# Altium PCB PCB2.PcbDoc
Units mil, origin at the board's own origin, x right, y up, seen from the top; angles counter-clockwise.
Board outline 3000 x 4000 mil, 2 copper layers (Top Layer, Bottom Layer); 26 components, 48 nets, 184 pads, 77 vias.
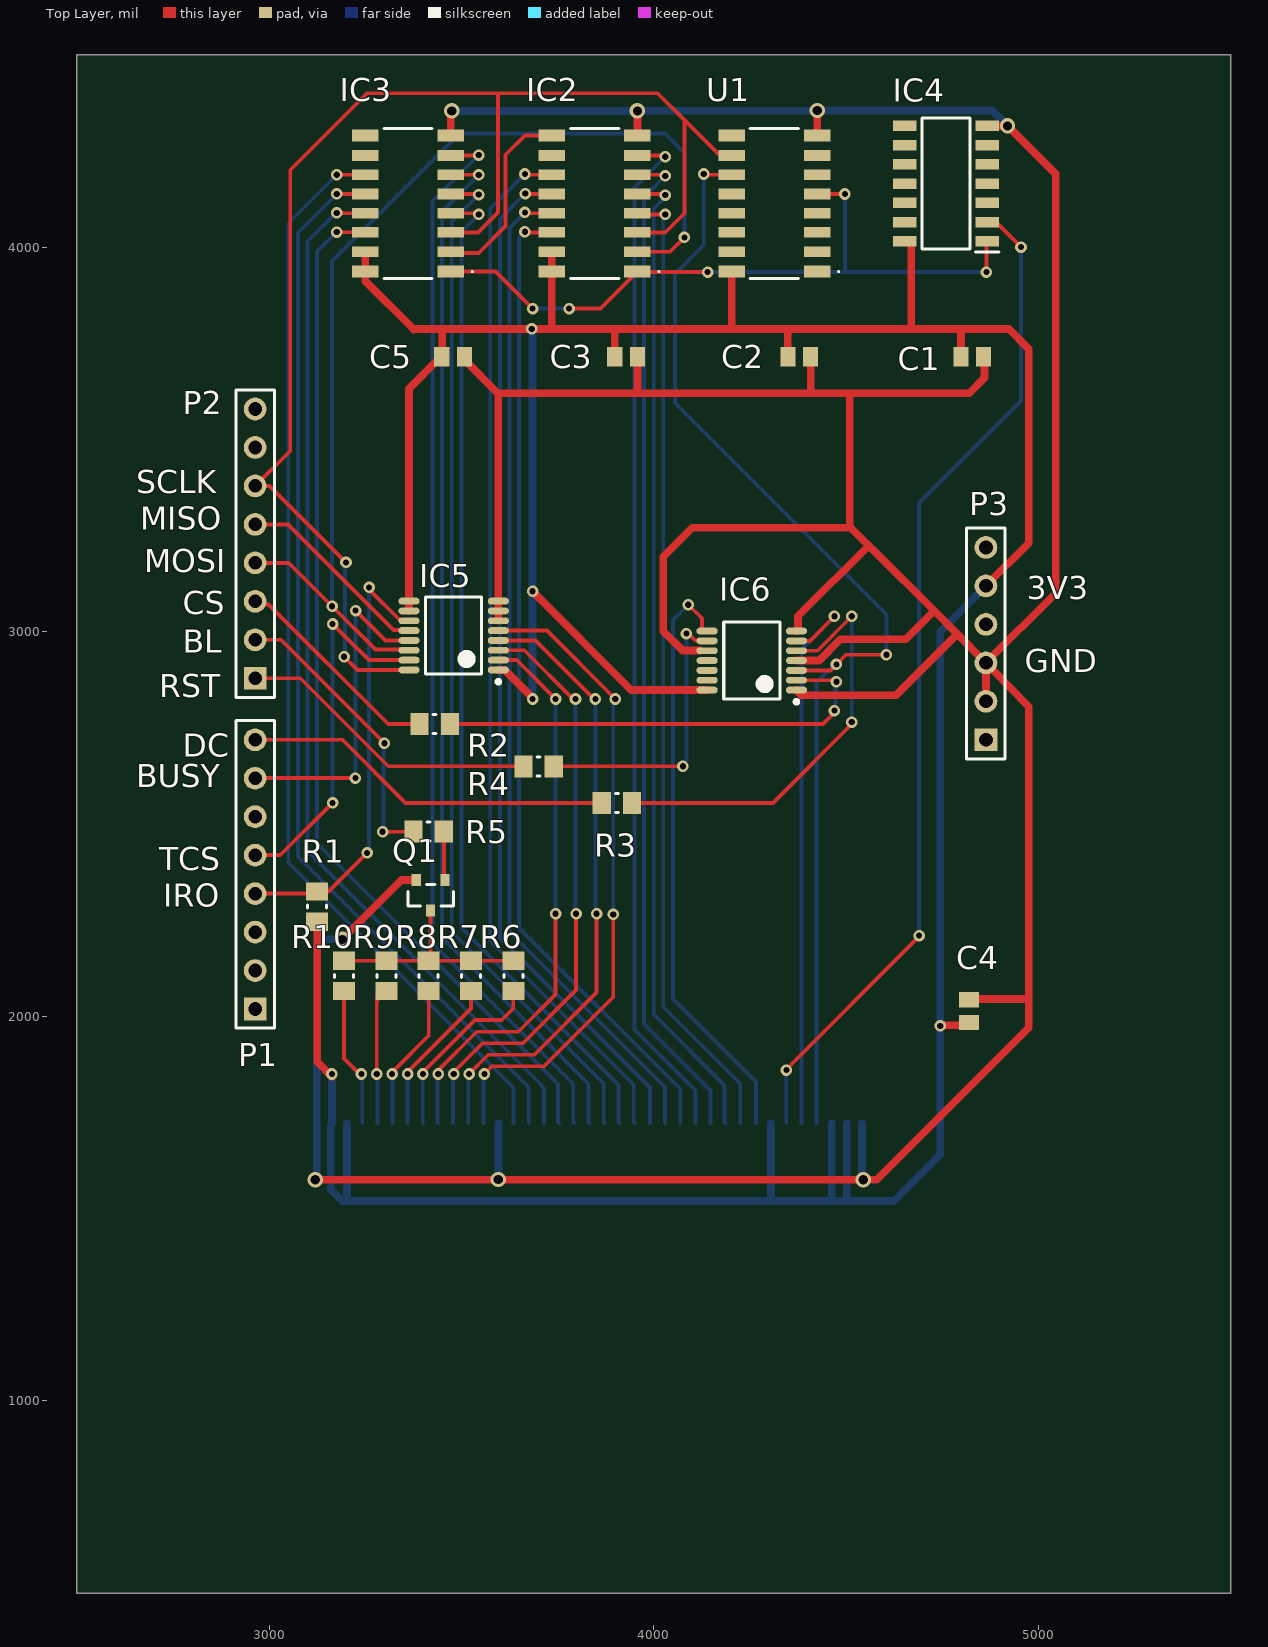
[diagram p0: Top Layer view]
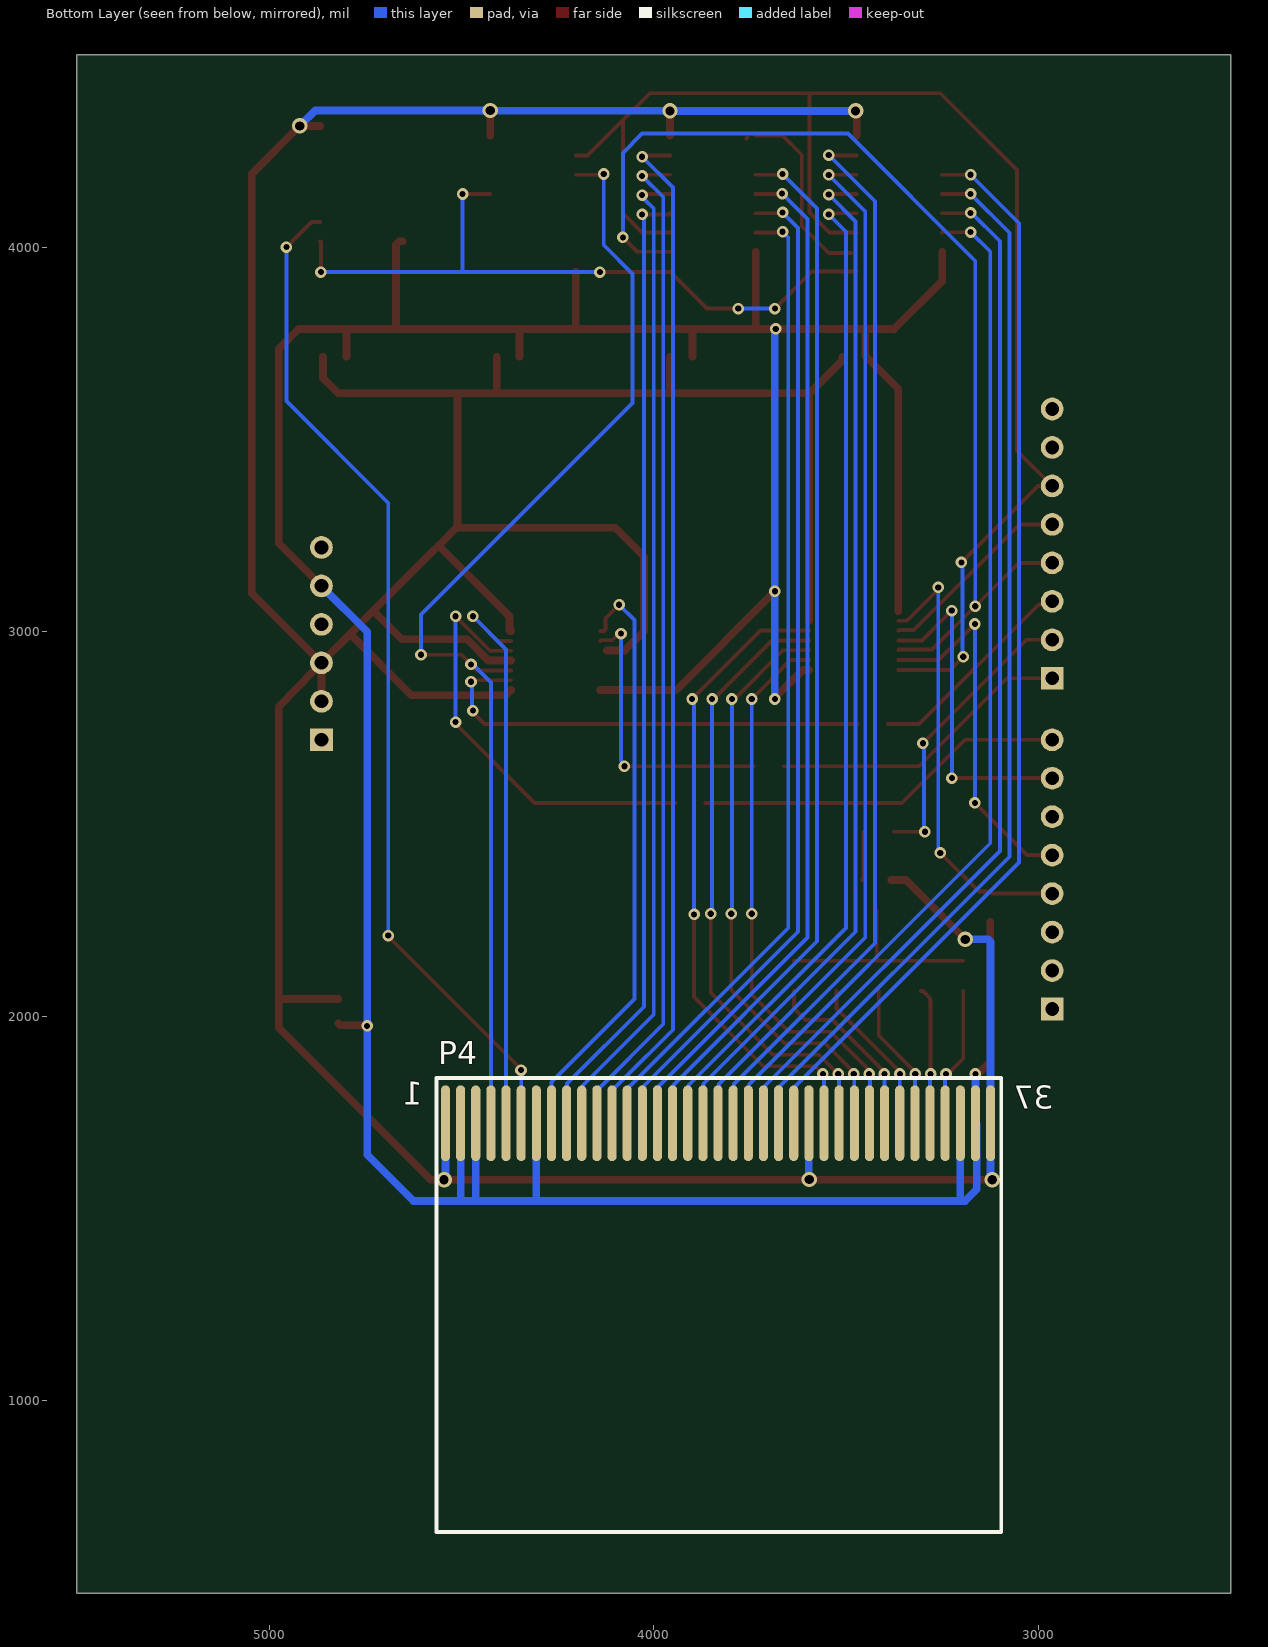
[diagram p1: Bottom Layer view, seen from below]
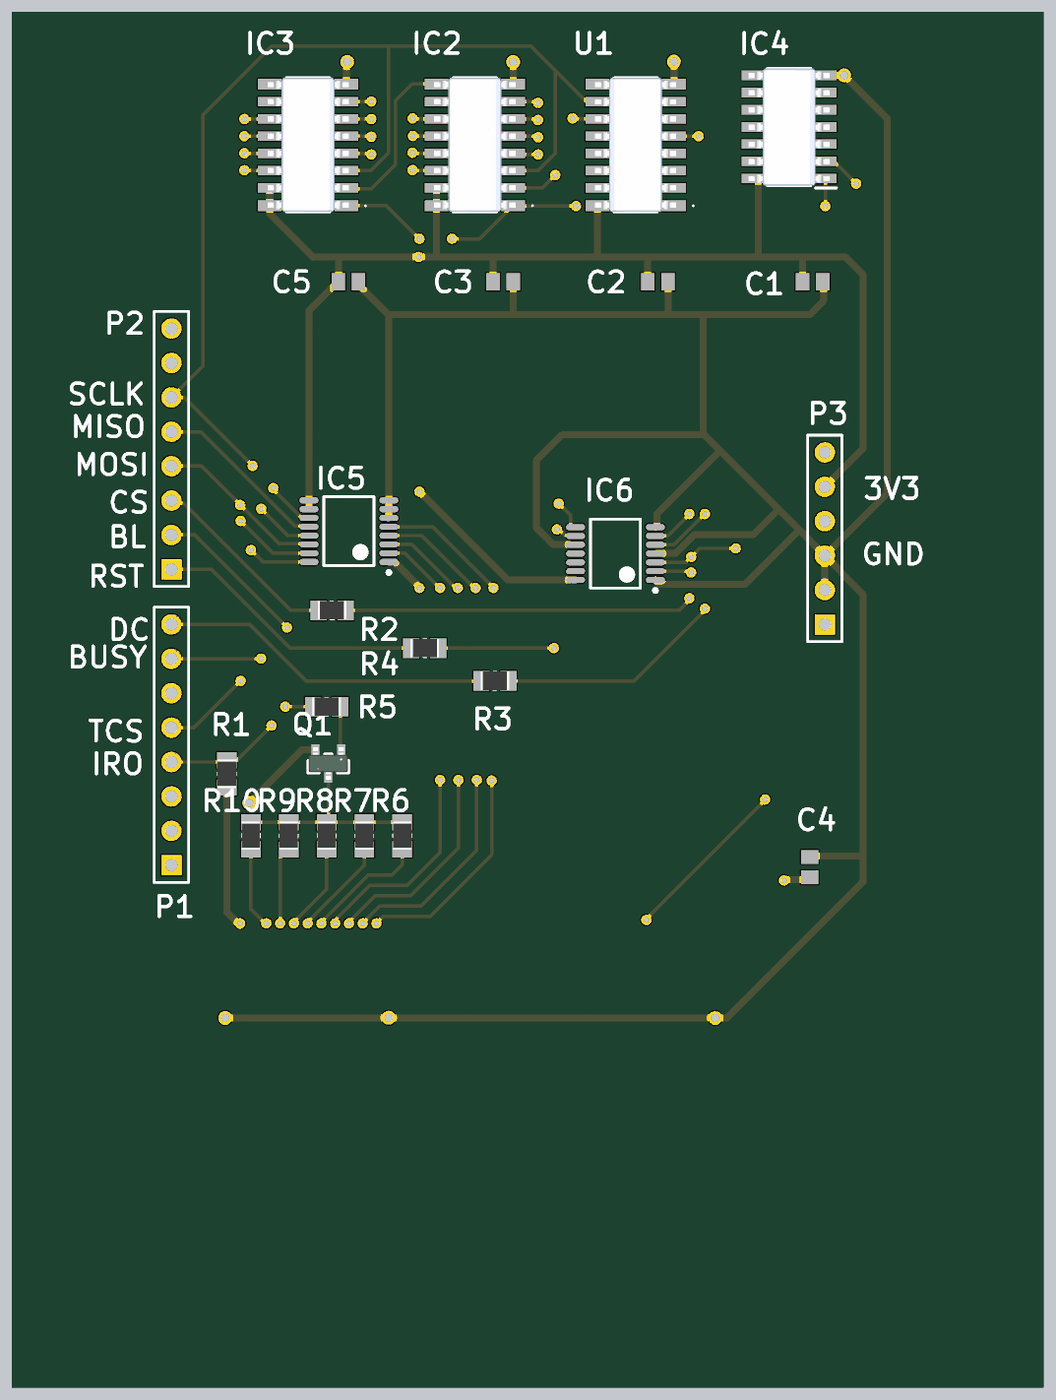
[diagram p2: 3D render of the assembled board from above, using the file's embedded part models]

## Layer stack, top to bottom
Top Solder: solder mask 0.4, Solder Resist, Dk 3.5
Top Layer: signal copper 1.4
Dielectric 1: dielectric 12.6, FR-4, Dk 4.8
Bottom Layer: signal copper 1.4
Bottom Solder: solder mask 0.4, Solder Resist, Dk 3.5

## Board outline
2500,500 5500,500 5500,4500 2500,4500

## Design rules (kind name [scope] priority, off if disabled: settings)
AcuteAngle [All] p1: minimum=9.00000000000000E+0001 checktracksonly=FALSE
Clearance [All] p1: gap=6 ignorepadtopadclearanceinfootprint=FALSE
HoleSize [All] p1: absolutevalues=TRUE maxlimit=200 minlimit=1 maxpercent=80.000 minpercent=20.000
PolygonConnect [All] p1: connectstyle=Relief reliefconductorwidth=10 reliefentries=4 polygonreliefangle="90 Angle" airgapwidth=10
RoutingVias [All] p1: holewidth=18 width=30 viastyle="Through Hole" minholewidth=12 minwidth=20 maxholewidth=28 maxwidth=50
ShortCircuit [All] p1 off: allowed=FALSE
SolderMaskExpansion [All] p1: expansion=4 istentingtop=FALSE
UnRoutedNet [All] p1 off:
Width [All] p1: maxlimit=100 minlimit=6 preferedwidth=10
27 further rules are at their usual default settings.

## Components (designator, comment, footprint, x,y, rotation, side; value= is the part's Value field where it differs from the comment)
C1 "104" CAPC2013X135X45LL10T25 4828.43,3715 r180 top
C2 "104" CAPC2013X135X45LL10T25 4378.43,3715 r180 top
C3 "104" CAPC2013X135X45LL10T25 3928.43,3715 r0 top
C4 "104" CAPC2013X135X45LL10T25 4820,2013.43 r90 top
C5 "104" CAPC2013X135X45LL10T25 3478.43,3715 r0 top
IC2 "74HC4094" 74HC4094D653 3846.22,4113.03 r90 top
IC3 "74HC4094" 74HC4094D653 3361.22,4113.03 r90 top
IC4 "74HC04D,653" SOIC127P600X175-14N 4760,4165 r180 top
IC5 "XPT2046" TSOP65P640X110-16N 3480,2990 r180 top
IC6 "74VHC125" SOP65P640X510-14N 4255,2925 r180 top
P1 "Header 8" HDR1X8 2963.86,2018.99 r90 top
P2 "Header 8" HDR1X8 2963.86,2878.99 r90 top
P3 "Header 6" HDR1X6 4863.85,2718.99 r90 top
P4 "Connector37" C37 4565,1840 r180 bottom
Q1 "SS8050-G" FP-SS8050-G-MFG 3420,2314.76 r270 top
R1 "100K" RESC2013X60X35ML10T20 3125,2285 r90 top
R2 "3K3" RESC2013X60X35ML10T20 3430.67,2760 r0 top
R3 "3K3" RESC2013X60X35ML10T20 3904.37,2555 r0 top
R4 "3K3" RESC2013X60X35ML10T20 3700.63,2650 r180 top
R5 "1K" RESC2013X60X35ML10T20 3415,2480 r0 top
R6 "10R" RESC2013X60X35ML10T20 3635,2105 r270 top
R7 "10R" RESC2013X60X35ML10T20 3525,2105 r270 top
R8 "10R" RESC2013X60X35ML10T20 3415,2105 r270 top
R9 "10R" RESC2013X60X35ML10T20 3305,2105 r270 top
R10 "10R" RESC2013X60X35ML10T20 3195,2105 r270 top
U1 "74HC4040" 74HC4040D653 4313.78,4113.03 r90 top

## Footprints (in the part's own frame and the unit in brackets; to place one, negate y for a bottom-side part, rotate by r counter-clockwise, add the part's x,y. Pads: shape width x height; smd on the part's side, far side on the other; paste and mask are expansions set on the pad)
74HC4040D653 [mm]
  rect 0.8x1.75 smd: 1(-4.495,-2.825) 8(4.495,-2.825) 9(4.495,2.825) 16(-4.495,2.825)
  rect 0.7x1.75 smd: 2(-3.175,-2.825) 3(-1.905,-2.825) 4(-0.635,-2.825) 5(0.635,-2.825) 6(1.905,-2.825) 7(3.175,-2.825) 10(3.175,2.825) 11(1.905,2.825) 12(0.635,2.825) 13(-0.635,2.825) 14(-1.905,2.825) 15(-3.175,2.825)
  silkscreen extent -4.95,-4.3 4.95,1.6, body extent -4.95,-3 4.95,3, height 1.56
74HC4094D653 [mm]
  rect 0.8x1.75 smd: 1(-4.495,-2.825) 8(4.495,-2.825) 9(4.495,2.825) 16(-4.495,2.825)
  rect 0.7x1.75 smd: 2(-3.175,-2.825) 3(-1.905,-2.825) 4(-0.635,-2.825) 5(0.635,-2.825) 6(1.905,-2.825) 7(3.175,-2.825) 10(3.175,2.825) 11(1.905,2.825) 12(0.635,2.825) 13(-0.635,2.825) 14(-1.905,2.825) 15(-3.175,2.825)
  silkscreen extent -4.95,-4.3 4.95,1.6, body extent -4.95,-3 4.95,3, height 1.56
C37 [mm]
  oval 0.6x5 smd: 1(0.6,-3) 2(1.6,-3) 3(2.6,-3) 4(3.6,-3) 5(4.6,-3) 6(5.6,-3) 7(6.6,-3) 8(7.6,-3) 9(8.6,-3) 10(9.6,-3) 11(10.6,-3) 12(11.6,-3) 13(12.6,-3) 14(13.6,-3) 15(14.6,-3) 16(15.6,-3) 17(16.6,-3) 18(17.6,-3) 19(18.6,-3) 20(19.6,-3) 21(20.6,-3) 22(21.6,-3) 23(22.6,-3) 24(23.6,-3) 25(24.6,-3) 26(25.6,-3) 27(26.6,-3) 28(27.6,-3) 29(28.6,-3) 30(29.6,-3) 31(30.6,-3) 32(31.6,-3) 33(32.6,-3) 34(33.6,-3) 35(34.6,-3) 36(35.6,-3) 37(36.6,-3)
  silkscreen extent 0,-30 37.3,0
CAPC2013X135X45LL10T25 [mm] "Chip Capacitor, 2-Leads, Body 2.00x1.25mm, IPC High Density"
  rect 1x1.3 smd: 1(-0.75,0) 2(0.75,0)
  body extent -1.05,-0.67 1.05,0.68, height 1.35
FP-SS8050-G-MFG [mm]
  rect 0.8x0.6 smd paste+0 mask+0: 1(-1.01,0.95) 2(-1.01,-0.95) 3(1.01,0)
  silkscreen extent -0.7,-1.5 0.7,1.5, body extent -1.51,-1.6 1.51,1.6, height 0.25
HDR1X6 [mm] "Connector; Header; 6 Position"
  rect 1.5x1.5 hole 0.9: 1(0,0)
  round 1.5 hole 0.9: 2(2.54,0) 3(5.08,0) 4(7.62,0) 5(10.16,0) 6(12.7,0)
  silkscreen extent -1.27,-1.27 13.97,1.27
HDR1X8 [mm] "Connector; Header; 8 Position"
  rect 1.5x1.5 hole 0.9: 1(0,0)
  round 1.5 hole 0.9: 2(2.54,0) 3(5.08,0) 4(7.62,0) 5(10.16,0) 6(12.7,0) 7(15.24,0) 8(17.78,0)
  silkscreen extent -1.27,-1.27 19.05,1.27
RESC2013X60X35ML10T20 [mm] "Chip Resistor, 2-Leads, Body 2.1x1.35mm, IPC Low Density"
  rect 1.2x1.45 smd: 1(-1,0) 2(1,0)
  silkscreen extent -0.1,-0.63 0.1,0.63, body extent -1.05,-0.68 1.05,0.67, height 0.6
SOIC127P600X175-14N [mm]
  rect 1.55x0.7 smd: 1(-2.725,3.81) 2(-2.725,2.54) 3(-2.725,1.27) 4(-2.725,0) 5(-2.725,-1.27) 6(-2.725,-2.54) 7(-2.725,-3.81) 8(2.725,-3.81) 9(2.725,-2.54) 10(2.725,-1.27) 11(2.725,0) 12(2.725,1.27) 13(2.725,2.54) 14(2.725,3.81)
  silkscreen extent -3.5,-4.33 1.6,4.51, body extent -3,-4.31 3,4.34, height 1.56
SOP65P640X510-14N [mm] "SOP, 14-Leads, Body 5.00x4.40mm, Pitch 0.65mm, IPC Medium Density"
  oval 1.4x0.45 smd: 1(-2.95,1.95) 2(-2.95,1.3) 3(-2.95,0.65) 4(-2.95,0) 5(-2.95,-0.65) 6(-2.95,-1.3) 7(-2.95,-1.95) 8(2.95,-1.95) 9(2.95,-1.3) 10(2.95,-0.65) 11(2.95,0) 12(2.95,0.65) 13(2.95,1.3) 14(2.95,1.95)
  silkscreen extent -3.08,-2.55 1.85,2.85, body extent -2.25,-2.55 2.25,2.55, height 5.1
TSOP65P640X110-16N [mm] "TSOP, 16-Leads, Body 5.00x4.40mm, Pitch 0.65mm, IPC Medium Density"
  oval 1.4x0.45 smd: 1(-2.95,2.275) 2(-2.95,1.625) 3(-2.95,0.975) 4(-2.95,0.325) 5(-2.95,-0.325) 6(-2.95,-0.975) 7(-2.95,-1.625) 8(-2.95,-2.275) 9(2.95,-2.275) 10(2.95,-1.625) 11(2.95,-0.975) 12(2.95,-0.325) 13(2.95,0.325) 14(2.95,0.975) 15(2.95,1.625) 16(2.95,2.275)
  silkscreen extent -3.08,-2.55 1.85,3.17, body extent -2.25,-2.55 2.25,2.55, height 1.1

## Part data
C1 C2 C3 C4 C5: library part CMP-2007-03607-1, Manufacturer=Murata, Part Number=GRM21BR72E103KW03L
IC2 IC3: library part 74HC4094D,653, "Integrated Circuit", Manufacturer_Name=Nexperia, Mouser Part Number=771-74HC4094D-T, Arrow Part Number=74HC4094D,653, Arrow Price/Stock=https://www.arrow.com/en/products/74hc4094d653/nexperia?region=nac, Datasheet Link=https://assets.nexperia.com/documents/data-sheet/74HC_HCT4094.pdf, Height=1.75mm, Manufacturer_Part_Number=74HC4094D,653, Mouser Price/Stock=https://www.mouser.co.uk/ProductDetail/Nexperia/74HC4094D653?qs=P62ublwmbi%2FnjmcB1cThvQ%3D%3D
IC4: "Integrated Circuit", Manufacturer_Name=Nexperia, Mouser Part Number=771-74HC04D-T, Arrow Part Number=74HC04D,653, Arrow Price/Stock=https://www.arrow.com/en/products/74hc04d653/nexperia?region=nac, Datasheet Link=https://assets.nexperia.com/documents/data-sheet/74HC_HCT04.pdf, Height=1.75mm, Manufacturer_Part_Number=74HC04D,653, Mouser Price/Stock=https://www.mouser.co.uk/ProductDetail/Nexperia/74HC04D653?qs=P62ublwmbi%252BLi7Vd8cc7xw%3D%3D
IC6: library part 74VHC125D,118, "Integrated Circuit", Manufacturer_Name=Nexperia, Mouser Part Number=771-74VHC125D118, Arrow Part Number=74VHC125D,118, Arrow Price/Stock=https://www.arrow.com/en/products/74vhc125d118/nexperia?region=nac, Datasheet Link=https://assets.nexperia.com/documents/data-sheet/74VHC_VHCT125.pdf, Height=1.75mm, Manufacturer_Part_Number=74VHC125D,118, Mouser Price/Stock=https://www.mouser.co.uk/ProductDetail/Nexperia/74VHC125D118?qs=jquClx72t9AbaQROblJdHA%3D%3D
P1 P2: "Header, 8-Pin", LatestRevisionDate=17-Jul-2002, LatestRevisionNote="Re-released for DXP Platform.", Publisher="Altium Limited"
P3: "Header, 6-Pin", LatestRevisionDate=17-Jul-2002, LatestRevisionNote="Re-released for DXP Platform.", Publisher="Altium Limited"
Q1: library part CMP-20235-000001-1, "NPN TRANSISTOR 1.5A 40V SOT-23 R", Case/Package=TO-236-3, Collector Emitter Breakdown Voltage=25V, Collector Emitter Voltage (VCEO)=400mV, Max Collector Current=1.5A, Max Power Dissipation=300mW, Transition Frequency=100MHz, Max Breakdown Voltage=25V, Mount="Surface Mount", Packaging="Tape and Reel", RoHS Compliant=Yes
R1: library part CMP-2100-03668-1, "Chip Resistor, 100 KOhm, +/- 1%, 0.125 W, -55 to 155 degC, 0805 (2012 Metric), RoHS, Tape and Reel", Case Code (Imperial)=0805, Case Code (Metric)=2012, Manufacturer=Yageo, Max Operating Temperature=155degC, Max Power Dissipation=125mW, Min Operating Temperature=-55degC, Package Description="2-Pin Surface Mounted Device, Body 2 x 1.25 mm", Package Quantity=1, Resistance=100KOhm, Temperature Coefficient=100ppm/degreesC, Tolerance=1%, Voltage Rating=150V, Case/Package=0805, Composition=ThickFilm, Datasheet URL=http://www.yageo.com/NewPortal/yageodocoutput?fileName=/pdf/R-Chip/PYu-RC_Group_51_RoHS_L_5.pdf, Datasheet Version="Rev. 5, 10/2016", Depth=1.25mm, Height=0.024inch, Lead Free=LeadFree, Lead Pitch=0.4mm, Length=2mm, Manufacturer URL=http://www.yageo.com/, Military Standard=Not, Number of Pins=2, Number of Terminations=2, Package Reference=0805, Packaging=TapeandReel, Power Rating=125mW, REACH SVHC=Unknown, RoHSCompliant=true, Termination=SMD/SMT, Voltage Rating (DC)=150V, Width=0.049inch
R2 R3 R4 R5: library part CMP-2100-03671-1, "Chip Resistor, 1 KOhm, +/- 1%, 125 mW, -55 to 155 degC, 0805 (2012 Metric), RoHS, Tape and Reel", Case Code (Imperial)=0805, Case Code (Metric)=2012, Manufacturer=Yageo, Max Operating Temperature=155degC, Max Power Dissipation=125mW, Min Operating Temperature=-55degC, Package Description="2-Pin Surface Mounted Device, Body 2 x 1.25 mm", Package Quantity=1, Resistance=1KOhm, Temperature Coefficient=100ppm/degreesC, Tolerance=1%, Voltage Rating=150V, Case/Package=0805, Composition=ThickFilm, Datasheet URL=http://www.yageo.com/NewPortal/yageodocoutput?fileName=/pdf/R-Chip/PYu-RC_Group_51_RoHS_L_5.pdf, Datasheet Version="Rev. 5, 10/2016", Depth=1.25mm, Height=0.024inch, Lead Free=LeadFree, Length=0.079inch, Manufacturer URL=http://www.yageo.com/, Military Standard=Not, Number of Pins=2, Number of Terminations=2, Package Reference=0805, Packaging=TapeandReel, Power Rating=125mW, REACH SVHC=Unknown, RoHSCompliant=true, Termination=SMD/SMT, Voltage Rating (DC)=150V, Width=0.049inch
R6 R7 R8 R9 R10: library part CMP-2100-03670-1, "Chip Resistor, 10 Ohm, +/- 1%, 0.125 W, -55 to 155 degC, 0805 (2012 Metric), RoHS, Tape and Reel", Case Code (Imperial)=0805, Case Code (Metric)=2012, Manufacturer=Yageo, Max Operating Temperature=155degC, Max Power Dissipation=125mW, Min Operating Temperature=-55degC, Package Description="2-Pin Surface Mounted Device, Body 2 x 1.25 mm", Package Quantity=1, Resistance=10Ohm, Temperature Coefficient=200ppm/degreesC, Tolerance=1%, Voltage Rating=150V, Case/Package=0805, Composition=ThickFilm, Datasheet URL=http://www.yageo.com/NewPortal/yageodocoutput?fileName=/pdf/R-Chip/PYu-RC_Group_51_RoHS_L_5.pdf, Datasheet Version="Rev. 5, 10/2016", Depth=1.25mm, Height=0.5mm, Lead Free=LeadFree, Length=2mm, Manufacturer URL=http://www.yageo.com/, Number of Pins=2, Number of Terminations=2, Package Reference=0805, Packaging=TapeandReel, Power Rating=125mW, REACH SVHC=NoSVHC, RoHSCompliant=true, Termination=SMD/SMT, Voltage Rating (DC)=150V, Width=1.25mm
U1: library part 74HC4040D,653, "Integrated Circuit", Manufacturer_Name=Nexperia, Mouser Part Number=771-74HC4040D-T, Arrow Part Number=74HC4040D,653, Arrow Price/Stock=https://www.arrow.com/en/products/74hc4040d653/nexperia, Datasheet Link=https://assets.nexperia.com/documents/data-sheet/74HC_HCT4040.pdf, Height=1.75mm, Manufacturer_Part_Number=74HC4040D,653, Mouser Price/Stock=https://www.mouser.co.uk/ProductDetail/Nexperia/74HC4040D653?qs=P62ublwmbi8%2FEE5KxYGUDg%3D%3D

## Via types
v1: diameter 30, hole 16, Top Layer to Bottom Layer, 69 vias
v2: diameter 40, hole 24, Top Layer to Bottom Layer, 8 vias

## Nets (pads, with @x,y where several pads share a name; then routed paths per layer and width w, separated by ;. In a path a pad name is that pad's centre, name@x,y a point inside that pad or via, vN(x,y) a via of type N, cw(c..) or ccw(c..) an arc to the next point about the centre after c; other vN are vias at no path point)
3V3: C1.2 C2.2 C3.1 C4.1 C5.1 IC2.15 IC2.16 IC3.15 IC3.16 IC4.14 IC5.1 IC5.9 IC5.10 IC6.14 P3.5 P4.2 P4.3 P4.7 P4.35 P4.36 R1.1 U1.16 | length 10531.5
  Top Layer w20: R1.1 3125,1881.85 v1@3163.43,1843.43 ; IC3.15 IC3.16 3250,3911.86 3375.93,3785.93 3377.15,3787.15 3450,3787.15 ; IC5.10 IC5.9 3363.86,3632 C5.1@3446.86,3715 ; C5.1 3450,3716.1 3450,3787.15 ; IC5.1 3612.75,2900.43 3685,2828.19 v1(3685,2825) ; v1(3685,3105) 3941.77,2848.23 IC6.14 ; IC2.15 IC2.16 3735,3787.15 ; C3.1 3898.9,3783.25 3895,3787.15 ; U1.16 4202.56,3787.15 ; C2.2 4348.9,3783.25 4345,3787.15 ; IC4.14 4661.22,4015 4670,4006.22 4670,3790 ; v1(4745,1975) 4746.91,1976.91 4815.05,1976.91 C4.1@4820,1981.86 ; C1.2 4798.9,3786.05 4800,3787.15 ; P3.5 4975,3230.14 4975,3735 4922.85,3787.15 4800,3787.15 ; 3450,3787.15 v1(3682.85,3787.15) 3735,3787.15 ; 3735,3787.15 3895,3787.15 ; 3895,3787.15 4202.56,3787.15 ; 4202.56,3787.15 4345,3787.15 ; 4345,3787.15 4800,3787.15
  Bottom Layer w20: v1@3163.43,1843.43 P4.36 3160,1718.46 3160,1550 3190,1520 3202.8,1520 ; P4.35 3202.8,1520 ; v1(3682.85,3787.15) 3685,3785 v1(3685,3105) v1(3685,2825) ; P4.7 4305.16,1520 ; P4.3 4462.64,1520 ; P4.2 4502.01,1520 ; P3.5 4863.85,3118.86 4745,3000 v1(4745,1975) 4745,1640 4625,1520 4502.01,1520 ; 3202.8,1520 4305.16,1520 ; 4305.16,1520 4462.64,1520 ; 4462.64,1520 4502.01,1520
  other v1: 3163.43,1850
"BL K1": P4.30 R6.2 | length 477.2
  Top Layer w10: v1(3400,1850) 3400,1855 3535,1990 3605,1990 3635,2020 R6.2
  Bottom Layer w10: P4.30 3399.65,1844.65 v1@3400,1845
"BL K2": P4.31 R7.2 | length 407.2
  Top Layer w10: v1(3360,1850) 3360,1855 3525,2020 R7.2
  Bottom Layer w10: v1@3360,1845 3360.28,1844.72 P4.31
"BL K3": P4.32 R8.2 | length 383.5
  Top Layer w10: v1@3320,1845 3321.91,1846.91 3321.91,1856.91 3415,1950 R8.2
  Bottom Layer w10: v1@3320,1845 3320.91,1844.09 P4.32
  other v1: 3320,1850
"BL K4": P4.33 R9.2 | length 357.6
  Top Layer w10: v1@3280,1845 3280,2040.63 3281.46,2042.09 3281.46,2047.01 3300.08,2065.63 R9.2
  Bottom Layer w10: v1@3280,1845 3281.54,1843.46 P4.33
  other v1: 3280,1850
"BL K5": P4.34 R10.2 | length 355.2
  Top Layer w10: R10.2 3195,1890 v1@3240,1845
  Bottom Layer w10: P4.34 v1@3242.17,1837.83
  other v1: 3240,1850
CLK/16: IC2.1 IC3.1 IC4.1 U1.5 | length 1828.9
  Top Layer w10: IC3.1 3588.94,3936.06 v1(3685,3840) ; v1(3780,3840) 3861.38,3840 IC2.1 3958.5,3935 v1(4140,3935) ; U1.5 v1(4496.97,4138.03) ; v1(4865.22,3934.78) 4865.22,4012.93 IC4.1
  Bottom Layer w10: v1(3685,3840) v1(3780,3840) ; v1(4140,3935) 4140.16,3935.16 4496.97,3935.16 ; v1(4496.97,4138.03) 4496.97,3935.16 ; v1(4865.22,3934.78) 4864.84,3935.16 4496.97,3935.16
D0: IC2.4 P4.9 | length 2522.4
  Top Layer w10: IC2.4 3960.47,4085 v1(4030,4085)
  Bottom Layer w10: v1(4030,4085) 4030,4082.29 4025,4077.29 4025,2025 4225,1825 4225,1723.31 P4.9
D1: IC2.5 P4.10 | length 2576.4
  Top Layer w10: IC2.5 4028.03,4138.03 v1@4030,4140
  Bottom Layer w10: v1(4030,4135) 4030,4132.29 4025,4127.29 4025,4125 4000,4100 4000,2005 4184.44,1820.56 4184.44,1724.5 P4.10
D2: IC2.6 P4.11 | length 2630.8
  Top Layer w10: IC2.6 4028.03,4188.03 v1@4030,4190
  Bottom Layer w10: v1(4030,4185) 3975,4130 3975,1980 4147.68,1807.32 P4.11
D3: IC2.7 P4.12 | length 2685.8
  Top Layer w10: IC2.7 4026.97,4238.03 v1(4030,4235)
  Bottom Layer w10: v1(4030,4235) 3950,4155 3950,1965 4079.68,1835.32 4080.04,1835.32 4108.31,1807.05 P4.12
D4: IC2.14 P4.13 | length 2568.7
  Top Layer w10: v1(3665,4040) 3666.97,4038.03 IC2.14
  Bottom Layer w10: v1(3665,4040) 3650,4025 3650,2230 4068.94,1811.06 P4.13
D5: IC2.13 P4.14 | length 2623.1
  Top Layer w10: v1(3665,4090) 3666.97,4088.03 IC2.13
  Bottom Layer w10: v1(3665,4090) 3625,4050 3625,2220 4029.57,1815.43 P4.14
D6: IC2.12 P4.15 | length 2676.9
  Top Layer w10: v1@3665,4140 3666.97,4138.03 IC2.12
  Bottom Layer w10: v1(3665.98,4139.02) 3600,4073.03 3600,2205 3990.2,1814.8 P4.15
D7: IC2.11 P4.16 | length 2731.9
  Top Layer w10: v1(3665,4190) 3666.97,4188.03 IC2.11
  Bottom Layer w10: v1(3665,4190) 3575,4100 3575,2195 3948.22,1821.78 3948.22,1724.5 P4.16
D8: IC3.4 P4.17 | length 2626
  Top Layer w10: IC3.4 3541.97,4088.03 v1(3545,4085)
  Bottom Layer w10: v1(3545,4085) 3500,4040 3500,2230 3908.85,1821.15 3908.85,1724.5 P4.17
D9: IC3.5 P4.18 | length 2681.3
  Top Layer w10: IC3.5 3543.03,4138.03 v1@3545,4140
  Bottom Layer w10: v1(3545,4136.34) 3475,4066.34 3475,2220 3870.33,1824.67 3870.33,1723.64 P4.18
D10: IC3.6 P4.19 | length 2737
  Top Layer w10: IC3.6 3543.03,4188.03 v1@3545,4190
  Bottom Layer w10: v1(3545,4187.68) 3450,4092.68 3450,2205 3830.65,1824.35 3830.65,1723.96 P4.19
D11: IC3.7 P4.20 | length 2792.8
  Top Layer w10: IC3.7 3543.03,4238.03 v1@3545,4240
  Bottom Layer w10: v1(3545,4239.02) 3425,4119.02 3425,2190 3790.96,1824.04 3790.96,1724.27 P4.20
D12: IC3.14 P4.21 | length 2673.2
  Top Layer w10: v1(3175.98,4039.02) 3176.48,4038.52 3249.51,4038.52 IC3.14
  Bottom Layer w10: v1(3175.98,4039.02) 3125,3988.03 3125,2450 3751.37,1823.63 3751.37,1724.5 P4.21
D13: IC3.13 P4.22 | length 2725.5
  Top Layer w10: v1@3180,4085 3183.03,4088.03 IC3.13
  Bottom Layer w10: v1(3175.98,4088.69) 3173.69,4088.69 3100,4015 3100,2430 3709.09,1820.91 3709.09,1817.7 3714.61,1812.19 P4.22
D14: IC3.12 P4.23 | length 2777.7
  Top Layer w10: v1@3180,4140 3181.97,4138.03 IC3.12
  Bottom Layer w10: v1(3175.98,4138.36) 3075,4037.38 3075,2415 3675.24,1814.76 P4.23
D15: IC3.11 P4.24 | length 2837.3
  Top Layer w10: v1@3175,4185 3178.03,4188.03 IC3.11
  Bottom Layer w10: v1(3175.98,4188.03) 3050,4062.05 3050,2400 3629.72,1820.28 3629.72,1818.33 3635.87,1812.19 P4.24
GND: C1.1 C2.1 C3.2 C4.2 C5.2 IC2.8 IC3.8 IC4.7 IC5.6 IC5.7 IC5.8 IC6.1 IC6.4 IC6.7 IC6.10 P3.2 P3.3 P4.1 P4.25 P4.37 Q1.2 U1.8 | length 12865.4
  Top Layer w20: v2(3120,1575) 3120.37,1575.37 3595.37,1575.37 v2(3595.75,1575.75) ; v2(3190,2200) 3344.53,2354.53 Q1.2 ; IC3.8 3472.44,4339.73 3473.09,4340.38 3473.09,4352.09 v2(3475,4354) ; C5.2@3510,3715 3510,3705 3595,3620 ; IC5.6 IC5.7 IC5.8 3596.14,3618.86 3595,3620 ; v2@3596.5,1575 v2(4545,1575) 4580,1575 4975,1970 4975,2045 ; IC2.8 3957.71,4290.27 v2(3957.71,4354) ; C3.2 3957.96,3620 ; IC6.10@4121.3,2951.32 4074.84,2951.32 4025,3001.16 4025,3195 4100,3270 4510,3270 ; IC6.1 4384.37,2835 4630,2835 4788.92,2993.92 ; IC6.4 4430,2925 4485,2980 4655,2980 4728.92,3053.92 ; IC6.7 4373.86,3001.77 4375,3002.91 4375,3040 4558.92,3223.92 ; C2.1 4407.96,3622.96 4405,3620 ; U1.8 v2(4425,4355) ; C4.2@4820,2045 4975,2045 ; C1.1@4860,3715 4860,3660 4820,3620 4510,3620 ; P3.2 P3.3 ; IC4.7 v2(4920,4315) 5045,4190 5045,3100.14 P3.3 ; 3595,3620 3957.96,3620 ; 3957.96,3620 4405,3620 ; 4405,3620 4510,3620 ; 4510,3270 4512.85,3270 4558.92,3223.92 ; 4510,3270 4510,3620 ; 4558.92,3223.92 4575.34,3207.5 4728.92,3053.92 ; 4728.92,3053.92 4788.92,2993.92 ; 4788.92,2993.92 P3.3 ; P3.3 4882.5,2900.35 4975,2805 4975,2045
  Bottom Layer w20: v2(3120,1575) 3120,1577.71 3124.06,1581.76 P4.37 3124.06,2194.06 3130,2200 v2(3190,2200) ; v2(3475,4354) 3954,4354 v2@3955,4355 ; v2(3595.75,1575.75) 3596.5,1576.5 P4.25 ; v2(3957.71,4354) 3958.21,4354.5 4424.5,4354.5 v2(4425,4355) 4880,4355 v2(4920,4315) ; P4.1 4541.38,1581.33 4545,1577.71 v2(4545,1575)
"LCD BL": P2.2 R5.1 | length 760.3
  Top Layer w10: P2.2 3031.01,2978.99 v1(3300,2710) ; v1(3295,2480) R5.1
  Bottom Layer w10: v1(3295,2480) 3297.5,2482.5 3297.5,2707.5 v1(3300,2710)
"LCD CS": P2.3 R2.1 | length 559.6
  Top Layer w10: P2.3 2971.76,3071.08 2998.92,3071.08 3310,2760 R2.1
"LCD CS'": IC6.3 P4.4 U1.11 | length 3050.4
  Top Layer w10: v1(4130,4190) 4131.97,4188.03 U1.11 ; IC6.3 4459.41,2899.41 v1(4475,2915) 4475.08,2915 4500.08,2940 v1(4605,2940)
  Bottom Layer w10: v1(4130,4190) 4130,4005 4055,3930 4055,3595 4605,3045 v1(4605,2940) ; P4.4 4423.27,2868.27 4470,2915 v1(4475,2915)
"LCD DC": P1.8 R3.1 | length 969.1
  Top Layer w10: P1.8 3191.01,2718.99 3355,2555 R3.1
"LCD DC'": IC6.6 P4.5 | length 1479.1
  Top Layer w10: IC6.6 4406.18,2976.18 v1(4470,3040)
  Bottom Layer w10: P4.5 4383.9,2953.9 v1(4470,3040)
"LCD RST": P2.1 R4.2 | length 792.3
  Top Layer w10: P2.1 3081.01,2878.99 3310,2650 R4.2
"LCD RST'": IC6.8 P4.8 | length 1548.5
  Top Layer w10: v1(4090,3070) 4125.16,3034.84 4125.16,3005.34 4128.72,3001.77 IC6.8
  Bottom Layer w10: v1(4090,3070) 4050,3030 4050,2045 4265.79,1829.21 P4.8
"LCD SCLK": IC4.2 P4.6 | length 2637.3
  Top Layer w10: v1(4345,1860) 4345,1862.5 4690,2207.5 v1(4690,2210) ; IC4.2 4890,4065 v1(4955,4000)
  Bottom Layer w10: v1@4340,1850 4344.53,1845.47 P4.6 ; v1(4690,2210) 4690,3335 4955,3600 v1(4955,4000)
MISO: IC5.12 P2.5 | length 514.4
  Top Layer w10: P2.5 3049.36,3278.99 3323.83,3004.53 3362.13,3004.53 IC5.12
MOSI: IC2.2 IC5.14 P2.4 | length 2823.8
  Top Layer w10: P2.4 3051.01,3178.99 v1(3163.83,3066.17) 3276.65,2953.35 3362.13,2953.35 IC5.14 ; IC2.2 4043.03,3988.03 v1(4080,4025)
  Bottom Layer w10: v1(3163.83,3066.17) 3163.83,3963.83 3495,4295 4030,4295 4080,4245 v1(4080,4025)
NetIC2_9: IC2.9 IC3.2 | length 487.8
  Top Layer w10: IC3.2@3486.22,3985 3545,3985 3615,4055 3615,4240 3665,4290 IC2.9 ; IC2.9@3755.75,4285 IC2.9@3758.78,4281.97
NetIC6_2: IC6.2 R2.2 | length 1194.9
  Top Layer w10: R2.2 4440,2760 v1@4470,2790 ; IC6.2 4471.18,2873.82 v1(4475,2870)
  Bottom Layer w10: v1(4470,2795) 4472.5,2797.5 4472.5,2867.5 v1(4475,2870)
NetIC6_5: IC6.5 R3.2 | length 1123.4
  Top Layer w10: R3.2 4310,2555 v1@4520,2765 ; IC6.5 4425.59,2950.59 v1(4515,3040) v1@4511.97,3043.03
  Bottom Layer w10: v1(4515,2765) v1(4515,3040)
NetIC6_9: IC6.9 R4.1 | length 746.4
  Top Layer w10: R4.1 v1(4076,2650) ; v1(4085,2995) 4090.41,2995 4107.75,2977.66 4137.38,2977.66 IC6.9
  Bottom Layer w10: v1(4076,2650) 4076,2655.41 4085,2664.41 v1(4085,2995)
NetQ1_1: Q1.1 R5.2 | length 132.8
  Top Layer w10: R5.2 3454.37,2354.37 3457.4,2357.4 Q1.1
NetQ1_3: Q1.3 R6.1 R7.1 R8.1 R9.1 R10.1 | length 572.7
  Top Layer w10: R10.1 R9.1 R8.1 R8.1@3420,2144.37 ; Q1.3 3420,2149.37 3417.5,2146.87 R8.1@3420,2144.37 ; R6.1 R7.1 R8.1@3420,2144.37
SCLK: IC2.3 IC3.3 IC5.16 P2.6 U1.10 | length 3744.4
  Top Layer w10: v1(3195,2935) 3229.57,2900.43 IC5.16 ; v1(3200,3180) 3001.01,3378.99 P2.6 3055,3470.14 3055,4200 3255,4400 3595,4400 ; IC3.3 3543.03,4038.03 3595,4090 3595,4400 ; IC2.3 4030,4038.03 4080,4088.03 4080,4330 ; U1.10 4171.97,4238.03 4080,4330 ; 3595,4400 4010,4400 4080,4330
  Bottom Layer w10: v1(3195,2935) 3197.5,2937.5 3197.5,3177.5 v1(3200,3180)
"TP BUSY": IC5.13 P1.7 | length 867.6
  Top Layer w10: P1.7 2964.11,2619.24 3224.24,2619.24 v1(3224.49,2619.49) ; v1(3225,3055) 3302.8,2977.2 IC5.13
  Bottom Layer w10: v1(3224.49,2619.49) 3224.75,2619.75 3224.75,3054.75 v1(3225,3055)
"TP CS": IC5.15 P1.5 | length 960.3
  Top Layer w10: P1.5 3028.99,2418.99 v1(3165,2555) ; v1(3165,3020) 3205,2980 3205.36,2980 3259.33,2926.02 IC5.15
  Bottom Layer w10: v1(3165,2555) v1(3165,3020)
"TP IRQ": IC5.11 P1.4 R1.2 | length 1182.8
  Top Layer w10: P1.4@2973.08,2328.21 P1.4 3119.62,2318.99 R1.2 3154.37,2324.37 v1(3255,2425) ; v1(3260,3115) 3260,3110 3337.76,3032.24 3339.21,3032.24 3343.07,3028.39 IC5.11
  Bottom Layer w10: v1(3255,2425) 3255,2427.71 3260,2432.71 v1(3260,3115)
X+: IC5.2 P4.29 | length 1487
  Top Layer w10: v1@3435.99,1850 3435.99,1855.41 3444.21,1863.63 3444.21,1864.21 3540,1960 3647.89,1960 3745,2057.11 v1(3745,2266.67) ; IC5.2 3643.98,2926.02 v1(3745,2825)
  Bottom Layer w10: v1@3435.99,1844.11 3437.5,1842.6 3437.5,1723.4 P4.29 ; v1@3745,2260 v1(3745,2266.67) v1(3745,2825)
  other v1: 3440,1850
X-: IC5.4 P4.27 | length 1623.3
  Top Layer w10: v1(3520,1850) 3570,1900 3690,1900 3851.67,2061.67 v1(3851.67,2266.67) ; IC5.4 3692.8,2977.2 v1@3850,2820
  Bottom Layer w10: v1@3515,1855 v1@3517.76,1852.24 ; P4.27 v1@3517.76,1837.24 ; v1@3846.67,2271.67 v1@3848.33,2270 ; v1@3848.33,2266.67 v1@3848.33,2270 ; v1(3848.33,2825) v1@3848.33,2270
Y+: IC5.3 P4.28 | length 1543.4
  Top Layer w10: v1@3475,1850 3555,1930 3660,1930 3798.33,2068.33 v1(3798.33,2266.67) ; IC5.3 3663.39,2951.61 v1@3790,2825
  Bottom Layer w10: P4.28 v1@3478.39,1838.39 ; v1@3793.33,2271.67 v1@3796.67,2268.33 ; v1(3796.67,2825) v1@3796.67,2268.33 ; v1@3801.67,2263.33 v1(3798.33,2266.67) v1@3796.67,2268.33
  other v1: 3480,1850
Y-: IC5.5 P4.26 | length 1696.4
  Top Layer w10: v1(3560,1850) 3580,1870 3715,1870 3895,2050 v1(3895,2265) ; IC5.5 3722.2,3002.8 v1(3900,2825)
  Bottom Layer w10: v1@3555,1855 v1@3557.13,1852.87 ; P4.26 v1@3557.13,1842.87 ; v1(3895,2265) 3895,2817.29 3900,2822.29 v1(3900,2825)
pads on no net: IC2.10 IC3.9 IC3.10 IC4.3 IC4.4 IC4.5 IC4.6 IC4.8 IC4.9 IC4.10 IC4.11 IC4.12 IC4.13 IC6.11 IC6.12 IC6.13 P1.1 P1.2 P1.3 P1.6 P2.7 P2.8 P3.1 P3.4 P3.6 U1.1 U1.2 U1.3 U1.4 U1.6 U1.7 U1.9 U1.12 U1.13 U1.14 U1.15

## Silkscreen, mask and mechanical layers (free items; w line width, h text height)
Top Overlay:
  text "SCLK" at 2655,3360 h60
  text "MISO" at 2665,3265 h60
  text "MOSI" at 2674.99,3155 h60
  text "3V3" at 4970,3085 h60
  text "CS" at 2774.96,3045 h60
  text "BL" at 2774.96,2945 h60
  text "GND" at 4965,2895 h60
  text "RST" at 2714.98,2830 h60
  text "DC" at 2774.96,2675 h60
  text "BUSY" at 2655,2595 h60
  text "TCS" at 2714.98,2380 h60
  text "IRO" at 2724.98,2285 h60
Bottom Overlay:
  text "1" at 4600,1770 h60
  text "37" at 2960,1760 h60
Mechanical 1:
  the board outline again, w10